# Altium PCB fpga.PcbDoc (part 1 of 6)
Units mm, origin at the board's own origin, x right, y up, seen from the top; angles counter-clockwise.
Board outline 111.63 x 111 mm, 2 copper layers (Top Layer, Bottom Layer); 5 components, 0 nets, 896 pads, 0 vias.
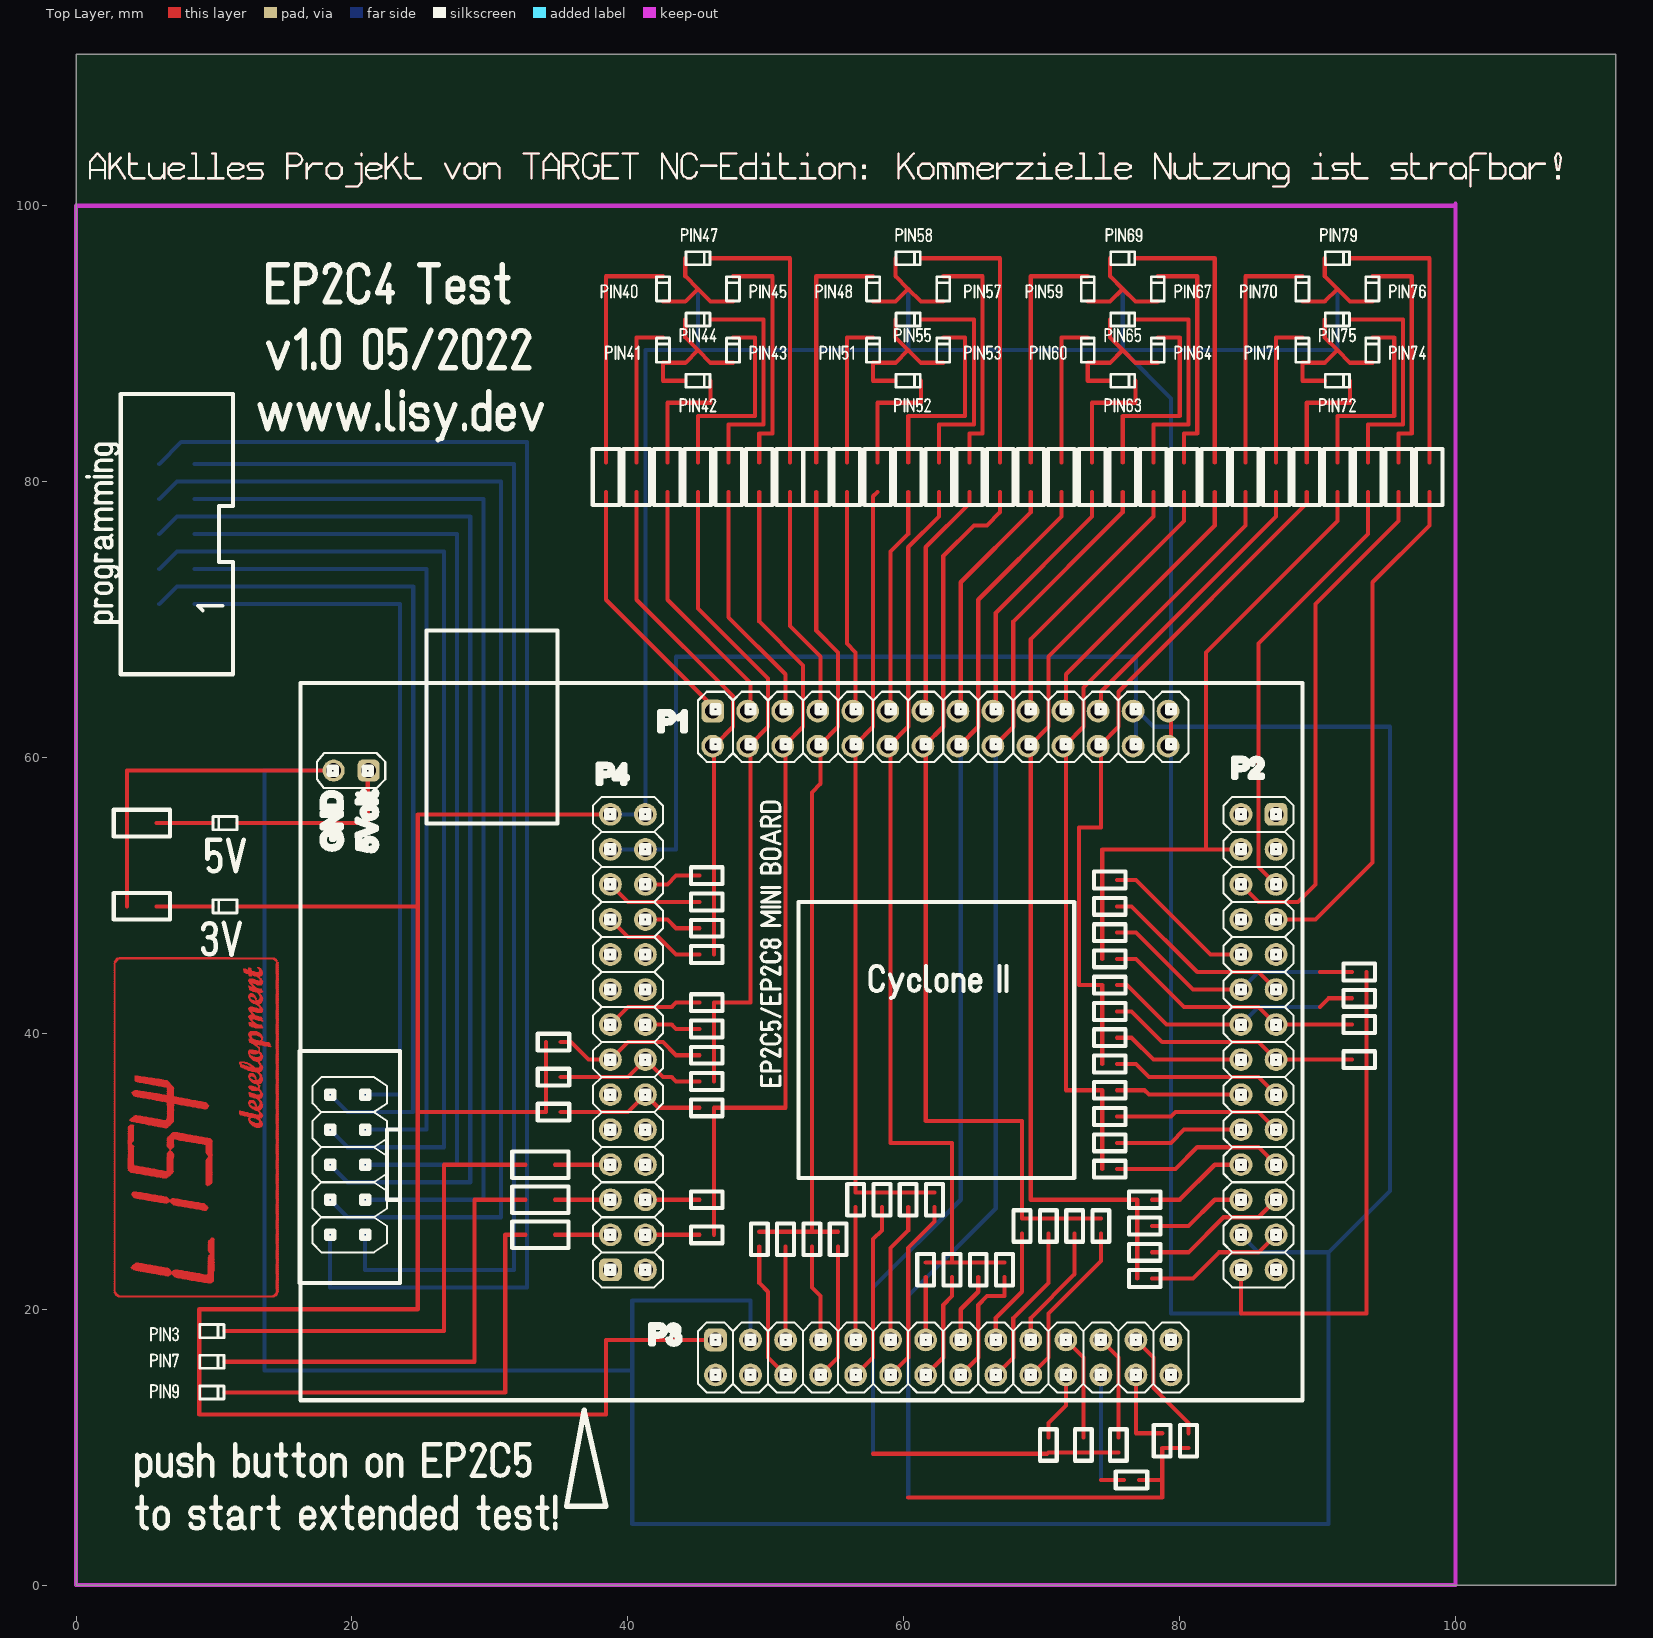
[diagram p0: Top Layer view]
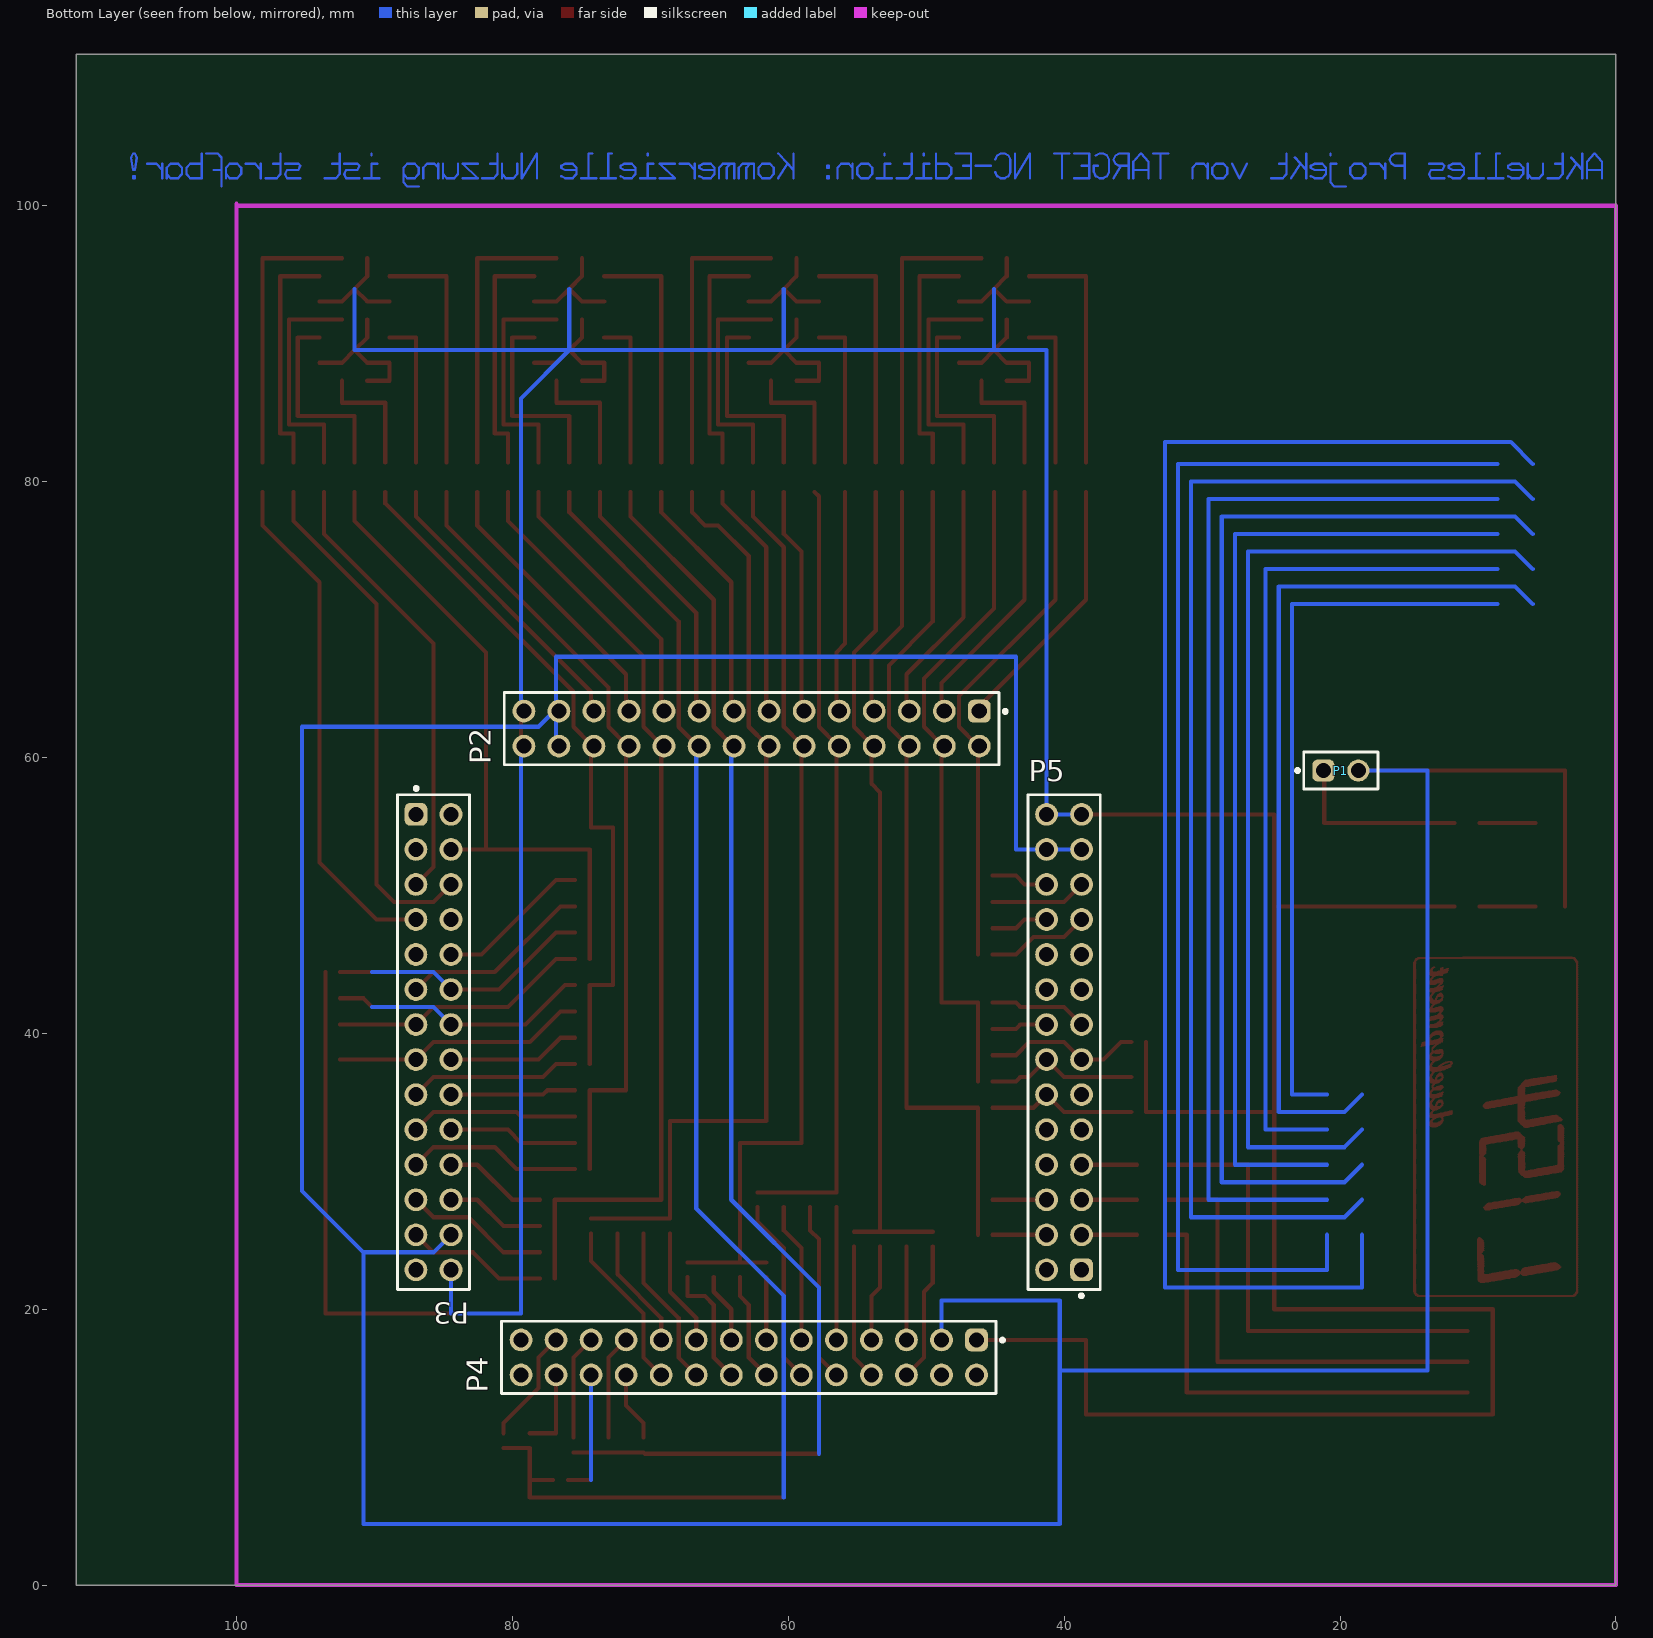
[diagram p1: Bottom Layer view, seen from below]

## Layer stack, top to bottom
Top Solder: solder mask 0.0102, Solder Resist, Dk 3.5
Top Layer: signal copper 0.0356
Dielectric 1: dielectric 0.32, FR-4, Dk 4.8
Bottom Layer: signal copper 0.0356
Bottom Solder: solder mask 0.0102, Solder Resist, Dk 3.5

## Board outline
0,0 111.633,0 111.633,110.998 0,110.998

## Design rules (kind name [scope] priority, off if disabled: settings)
Clearance [All] p1: gap=0.254 ignorepadtopadclearanceinfootprint=FALSE
PolygonConnect [All] p1: connectstyle=Relief reliefconductorwidth=0.254 reliefentries=4 polygonreliefangle="90 Angle" airgapwidth=0.254
RoutingVias [All] p1: holewidth=0.711 width=1.27 viastyle="Through Hole" minholewidth=0.711 minwidth=1.27 maxholewidth=0.711 maxwidth=1.27
SolderMaskExpansion [All] p1: expansion=0.102 istentingtop=FALSE
Width [All] p1: maxlimit=0.254 minlimit=0.254 preferedwidth=0.254
30 further rules are at their usual default settings.

## Components (designator, comment, footprint, x,y, rotation, side; value= is the part's Value field where it differs from the comment)
P1 "61300211121" 61300211121 19.939,59.055 r180 bottom
P2 "61302821121" 61302821121 62.66,62.095 r0 bottom
P3 "61302821121" 61302821121 85.725,39.37 r270 bottom (schematic designator P2)
P4 "61302821121" 61302821121 62.865,16.51 r0 bottom (schematic designator P2)
P5 "61302821121" 61302821121 40.005,39.37 r90 bottom (schematic designator P2)

## Footprints (in the part's own frame and the unit in brackets; to place one, negate y for a bottom-side part, rotate by r counter-clockwise, add the part's x,y. Pads: shape width x height; smd on the part's side, far side on the other; paste and mask are expansions set on the pad)
61300211121 [mm] "Pin Header, pitch 2.54 mm, THT, Vertical, single row, 2p"
  rrect50% 1.6x1.6 hole 1.1: 1(-1.27,0)
  round 1.6 hole 1.1: 2(1.27,0)
  silkscreen extent -3.26,-1.35 2.69,1.35, body extent -2.54,-1.27 2.54,1.27, height 8.57
61302821121 [mm] "Pin Header, pitch 2.54 mm, THT, Vertical, dual row, 28p"
  rrect50% 1.65x1.65 hole 1.1: 1(-16.51,-1.27)
  round 1.65 hole 1.1: 2(-16.51,1.27) 3(-13.97,-1.27) 4(-13.97,1.27) 5(-11.43,-1.27) 6(-11.43,1.27) 7(-8.89,-1.27) 8(-8.89,1.27) 9(-6.35,-1.27) 10(-6.35,1.27) 11(-3.81,-1.27) 12(-3.81,1.27) 13(-1.27,-1.27) 14(-1.27,1.27) 15(1.27,-1.27) 16(1.27,1.27) 17(3.81,-1.27) 18(3.81,1.27) 19(6.35,-1.27) 20(6.35,1.27) 21(8.89,-1.27) 22(8.89,1.27) 23(11.43,-1.27) 24(11.43,1.27) 25(13.97,-1.27) 26(13.97,1.27) 27(16.51,-1.27) 28(16.51,1.27)
  silkscreen extent -18.51,-2.62 17.93,2.62, body extent -17.78,-2.54 17.78,2.54, height 8.59

## Part data
P1: library part CMP-1712-00002-6, Color=Black, Contact Resistance=20mΩ, Current Rating=3A, Max Operating Temperature=125°C, Min Operating Temperature=-40°C, Operating Supply Voltage=250V, Connector Type="Male Pin", Contact Gender=Male, Contact Material=Copper, Contact Mating Length=5.9944mm, Contact Plating=Gold, Gender=Male, Height=8.94mm, Housing Material=PBT, Lead Free="Lead Free", Lead Pitch=2.54mm, Mount="Through Hole", NexarPartId=20081794, Number of Contacts=2, Number of Pins=2, Number of Positions=2, Number of Rows=1, Orientation=Vertical, Packaging=Bulk, Pitch=2.54mm, REACH SVHC="No SVHC", RoHS=Compliant, Termination="Through Hole", Voltage Rating=250V
P2 P3 P4 P5: library part CMP-1502-01115-3, Color=Black, Contact Resistance=20mΩ, Current Rating=3A, Operating Supply Voltage=250V, Connector Type="Male Pin", Contact Material=Copper, Contact Mating Length=5.9944mm, Contact Plating=Gold, Gender=Male, Lead Pitch=2.54mm, Mount="Through Hole", NexarPartId=32855566, Number of Contacts=28, Number of Pins=28, Number of Positions=28, Number of Rows=2, Orientation=Vertical, Packaging=Bulk, Pitch=2.54mm, REACH SVHC=Unknown, RoHS=Compliant, Row Spacing=2.54mm, Termination=Solder

## Free pads (board coordinates)
  rect 0x0 on Top Paste: 1(3.696,49.212) 1(3.696,55.245) 1(5.829,49.212) 1(5.829,55.245) 1(8.925,13.97) 1(8.925,16.192) 1(8.925,18.415) 1(9.877,49.212) 1(9.877,55.245) 1(10.76,13.97) 1(10.76,16.192) 1(10.76,18.415) 1(11.712,49.212) 1(11.712,55.245) 1(32.588,25.4) 1(32.588,27.94) 1(32.588,30.48) 1(34.074,34.29) 1(34.074,36.83) 1(34.074,39.37) 1(34.722,25.4) 1(34.722,27.94) 1(34.722,30.48) 1(35.141,34.29) 1(35.141,36.83) 1(35.141,39.37) 1(38.417,79.261) 1(38.417,81.394) 1(40.64,79.261) 1(40.64,81.394) 1(42.545,88.617) 1(42.545,90.452) 1(42.545,93.062) 1(42.545,94.897) 1(42.862,79.261) 1(42.862,81.394) 1(44.167,87.312) 1(44.167,91.757) 1(44.167,96.203) 1(45.085,79.261) 1(45.085,81.394) 1(45.187,25.4) 1(45.187,27.94) 1(45.187,34.608) 1(45.187,36.512) 1(45.187,38.417) 1(45.187,40.322) 1(45.187,42.227) 1(45.187,45.72) 1(45.187,47.625) 1(45.187,49.53) 1(45.187,51.435) 1(46.002,87.312) 1(46.002,91.757) 1(46.002,96.203) 1(46.253,25.4) 1(46.253,27.94) 1(46.253,34.608) 1(46.253,36.512) 1(46.253,38.417) 1(46.253,40.322) 1(46.253,42.227) 1(46.253,45.72) 1(46.253,47.625) 1(46.253,49.53) 1(46.253,51.435) 1(47.307,79.261) 1(47.307,81.394) 1(47.625,88.617) 1(47.625,90.452) 1(47.625,93.062) 1(47.625,94.897) 1(49.53,24.549) 1(49.53,25.616) 1(49.53,79.261) 1(49.53,81.394) 1(51.435,24.549) 1(51.435,25.616) 1(51.752,79.261) 1(51.752,81.394) 1(53.34,24.549) 1(53.34,25.616) 1(53.657,79.261) 1(53.657,81.394) 1(55.245,24.549) 1(55.245,25.616) 1(55.88,79.261) 1(55.88,81.394) 1(56.515,27.407) 1(56.515,28.473) 1(57.785,88.617) 1(57.785,90.452) 1(57.785,93.062) 1(57.785,94.897) 1(58.102,79.261) 1(58.102,81.394) 1(58.42,27.407) 1(58.42,28.473) 1(59.407,87.312) 1(59.407,91.757) 1(59.407,96.203) 1(60.325,27.407) 1(60.325,28.473) 1(60.325,79.261) 1(60.325,81.394) 1(61.242,87.312) 1(61.242,91.757) 1(61.242,96.203) 1(61.595,22.327) 1(61.595,23.393) 1(62.23,27.407) 1(62.23,28.473) 1(62.547,79.261) 1(62.547,81.394) 1(62.865,88.617) 1(62.865,90.452) 1(62.865,93.062) 1(62.865,94.897) 1(63.5,22.327) 1(63.5,23.393) 1(64.77,79.261) 1(64.77,81.394) 1(65.405,22.327) 1(65.405,23.393) 1(66.992,79.261) 1(66.992,81.394) 1(67.31,22.327) 1(67.31,23.393) 1(68.58,25.502) 1(68.58,26.568) 1(69.215,79.261) 1(69.215,81.394) 1(70.485,9.627) 1(70.485,10.693) 1(70.485,25.502) 1(70.485,26.568) 1(71.438,79.261) 1(71.438,81.394) 1(72.39,25.502) 1(72.39,26.568) 1(73.025,9.627) 1(73.025,10.693) 1(73.343,88.617) 1(73.343,90.452) 1(73.343,93.062) 1(73.343,94.897) 1(73.66,79.261) 1(73.66,81.394) 1(74.295,25.502) 1(74.295,26.568) 1(74.397,30.162) 1(74.397,32.067) 1(74.397,33.972) 1(74.397,35.877) 1(74.397,37.782) 1(74.397,39.688) 1(74.397,41.593) 1(74.397,43.497) 1(74.397,45.402) 1(74.397,47.307) 1(74.397,49.212) 1(74.397,51.117) 1(74.965,87.312) 1(74.965,91.757) 1(74.965,96.203) 1(75.463,30.162) 1(75.463,32.067) 1(75.463,33.972) 1(75.463,35.877) 1(75.463,37.782) 1(75.463,39.688) 1(75.463,41.593) 1(75.463,43.497) 1(75.463,45.402) 1(75.463,47.307) 1(75.463,49.212) 1(75.463,51.117) 1(75.565,9.627) 1(75.565,10.693) 1(75.882,79.261) 1(75.882,81.394) 1(75.984,7.62) 1(76.8,87.312) 1(76.8,91.757) 1(76.8,96.203) 1(76.937,22.225) 1(76.937,24.13) 1(76.937,26.035) 1(76.937,27.94) 1(77.051,7.62) 1(78.003,22.225) 1(78.003,24.13) 1(78.003,26.035) 1(78.003,27.94) 1(78.105,79.261) 1(78.105,81.394) 1(78.422,88.617) 1(78.422,90.452) 1(78.422,93.062) 1(78.422,94.897) 1(78.74,9.944) 1(78.74,11.011) 1(80.328,79.261) 1(80.328,81.394) 1(80.645,9.944) 1(80.645,11.011) 1(82.55,79.261) 1(82.55,81.394) 1(84.772,79.261) 1(84.772,81.394) 1(86.995,79.261) 1(86.995,81.394) 1(88.9,88.617) 1(88.9,90.452) 1(88.9,93.062) 1(88.9,94.897) 1(89.218,79.261) 1(89.218,81.394) 1(90.522,87.312) 1(90.522,91.757) 1(90.522,96.203) 1(91.44,79.261) 1(91.44,81.394) 1(92.357,87.312) 1(92.357,91.757) 1(92.357,96.203) 1(92.494,38.1) 1(92.494,40.64) 1(92.494,42.545) 1(92.494,44.45) 1(93.561,38.1) 1(93.561,40.64) 1(93.561,42.545) 1(93.561,44.45) 1(93.662,79.261) 1(93.662,81.394) 1(93.98,88.617) 1(93.98,90.452) 1(93.98,93.062) 1(93.98,94.897) 1(95.885,79.261) 1(95.885,81.394) 1(98.108,79.261) 1(98.108,81.394)
  rect 0x0 on Top Solder: 1(3.696,49.212) 1(3.696,55.245) 1(5.829,49.212) 1(5.829,55.245) 1(8.925,13.97) 1(8.925,16.192) 1(8.925,18.415) 1(9.877,49.212) 1(9.877,55.245) 1(10.76,13.97) 1(10.76,16.192) 1(10.76,18.415) 1(11.712,49.212) 1(11.712,55.245) 1(32.588,25.4) 1(32.588,27.94) 1(32.588,30.48) 1(34.074,34.29) 1(34.074,36.83) 1(34.074,39.37) 1(34.722,25.4) 1(34.722,27.94) 1(34.722,30.48) 1(35.141,34.29) 1(35.141,36.83) 1(35.141,39.37) 1(38.417,79.261) 1(38.417,81.394) 1(40.64,79.261) 1(40.64,81.394) 1(42.545,88.617) 1(42.545,90.452) 1(42.545,93.062) 1(42.545,94.897) 1(42.862,79.261) 1(42.862,81.394) 1(44.167,87.312) 1(44.167,91.757) 1(44.167,96.203) 1(45.085,79.261) 1(45.085,81.394) 1(45.187,25.4) 1(45.187,27.94) 1(45.187,34.608) 1(45.187,36.512) 1(45.187,38.417) 1(45.187,40.322) 1(45.187,42.227) 1(45.187,45.72) 1(45.187,47.625) 1(45.187,49.53) 1(45.187,51.435) 1(46.002,87.312) 1(46.002,91.757) 1(46.002,96.203) 1(46.253,25.4) 1(46.253,27.94) 1(46.253,34.608) 1(46.253,36.512) 1(46.253,38.417) 1(46.253,40.322) 1(46.253,42.227) 1(46.253,45.72) 1(46.253,47.625) 1(46.253,49.53) 1(46.253,51.435) 1(47.307,79.261) 1(47.307,81.394) 1(47.625,88.617) 1(47.625,90.452) 1(47.625,93.062) 1(47.625,94.897) 1(49.53,24.549) 1(49.53,25.616) 1(49.53,79.261) 1(49.53,81.394) 1(51.435,24.549) 1(51.435,25.616) 1(51.752,79.261) 1(51.752,81.394) 1(53.34,24.549) 1(53.34,25.616) 1(53.657,79.261) 1(53.657,81.394) 1(55.245,24.549) 1(55.245,25.616) 1(55.88,79.261) 1(55.88,81.394) 1(56.515,27.407) 1(56.515,28.473) 1(57.785,88.617) 1(57.785,90.452) 1(57.785,93.062) 1(57.785,94.897) 1(58.102,79.261) 1(58.102,81.394) 1(58.42,27.407) 1(58.42,28.473) 1(59.407,87.312) 1(59.407,91.757) 1(59.407,96.203) 1(60.325,27.407) 1(60.325,28.473) 1(60.325,79.261) 1(60.325,81.394) 1(61.242,87.312) 1(61.242,91.757) 1(61.242,96.203) 1(61.595,22.327) 1(61.595,23.393) 1(62.23,27.407) 1(62.23,28.473) 1(62.547,79.261) 1(62.547,81.394) 1(62.865,88.617) 1(62.865,90.452) 1(62.865,93.062) 1(62.865,94.897) 1(63.5,22.327) 1(63.5,23.393) 1(64.77,79.261) 1(64.77,81.394) 1(65.405,22.327) 1(65.405,23.393) 1(66.992,79.261) 1(66.992,81.394) 1(67.31,22.327) 1(67.31,23.393) 1(68.58,25.502) 1(68.58,26.568) 1(69.215,79.261) 1(69.215,81.394) 1(70.485,9.627) 1(70.485,10.693) 1(70.485,25.502) 1(70.485,26.568) 1(71.438,79.261) 1(71.438,81.394) 1(72.39,25.502) 1(72.39,26.568) 1(73.025,9.627) 1(73.025,10.693) 1(73.343,88.617) 1(73.343,90.452) 1(73.343,93.062) 1(73.343,94.897) 1(73.66,79.261) 1(73.66,81.394) 1(74.295,25.502) 1(74.295,26.568) 1(74.397,30.162) 1(74.397,32.067) 1(74.397,33.972) 1(74.397,35.877) 1(74.397,37.782) 1(74.397,39.688) 1(74.397,41.593) 1(74.397,43.497) 1(74.397,45.402) 1(74.397,47.307) 1(74.397,49.212) 1(74.397,51.117) 1(74.965,87.312) 1(74.965,91.757) 1(74.965,96.203) 1(75.463,30.162) 1(75.463,32.067) 1(75.463,33.972) 1(75.463,35.877) 1(75.463,37.782) 1(75.463,39.688) 1(75.463,41.593) 1(75.463,43.497) 1(75.463,45.402) 1(75.463,47.307) 1(75.463,49.212) 1(75.463,51.117) 1(75.565,9.627) 1(75.565,10.693) 1(75.882,79.261) 1(75.882,81.394) 1(75.984,7.62) 1(76.8,87.312) 1(76.8,91.757) 1(76.8,96.203) 1(76.937,22.225) 1(76.937,24.13) 1(76.937,26.035) 1(76.937,27.94) 1(77.051,7.62) 1(78.003,22.225) 1(78.003,24.13) 1(78.003,26.035) 1(78.003,27.94) 1(78.105,79.261) 1(78.105,81.394) 1(78.422,88.617) 1(78.422,90.452) 1(78.422,93.062) 1(78.422,94.897) 1(78.74,9.944) 1(78.74,11.011) 1(80.328,79.261) 1(80.328,81.394) 1(80.645,9.944) 1(80.645,11.011) 1(82.55,79.261) 1(82.55,81.394) 1(84.772,79.261) 1(84.772,81.394) 1(86.995,79.261) 1(86.995,81.394) 1(88.9,88.617) 1(88.9,90.452) 1(88.9,93.062) 1(88.9,94.897) 1(89.218,79.261) 1(89.218,81.394) 1(90.522,87.312) 1(90.522,91.757) 1(90.522,96.203) 1(91.44,79.261) 1(91.44,81.394) 1(92.357,87.312) 1(92.357,91.757) 1(92.357,96.203) 1(92.494,38.1) 1(92.494,40.64) 1(92.494,42.545) 1(92.494,44.45) 1(93.561,38.1) 1(93.561,40.64) 1(93.561,42.545) 1(93.561,44.45) 1(93.662,79.261) 1(93.662,81.394) 1(93.98,88.617) 1(93.98,90.452) 1(93.98,93.062) 1(93.98,94.897) 1(95.885,79.261) 1(95.885,81.394) 1(98.108,79.261) 1(98.108,81.394)
  round 0 on Bottom Solder: 1(6.032,71.12) 1(6.032,73.66) 1(6.032,76.2) 1(6.032,78.74) 1(6.032,81.28) 1(8.572,71.12) 1(8.572,73.66) 1(8.572,76.2) 1(8.572,78.74) 1(8.572,81.28) 1(18.415,25.4) 1(18.415,27.94) 1(18.415,30.48) 1(18.415,33.02) 1(18.415,35.56) 1(18.605,59.055) 1(20.955,25.4) 1(20.955,27.94) 1(20.955,30.48) 1(20.955,33.02) 1(20.955,35.56) 1(21.145,59.055) 1(38.735,22.86) 1(38.735,25.4) 1(38.735,27.94) 1(38.735,30.48) 1(38.735,33.02) 1(38.735,35.56) 1(38.735,38.1) 1(38.735,40.64) 1(38.735,43.18) 1(38.735,45.72) 1(38.735,48.26) 1(38.735,50.8) 1(38.735,53.34) 1(38.735,55.88) 1(41.275,22.86) 1(41.275,25.4) 1(41.275,27.94) 1(41.275,30.48) 1(41.275,33.02) 1(41.275,35.56) 1(41.275,38.1) 1(41.275,40.64) 1(41.275,43.18) 1(41.275,45.72) 1(41.275,48.26) 1(41.275,50.8) 1(41.275,53.34) 1(41.275,55.88) 1(45.085,89.535) 1(45.085,93.98) 1(46.355,15.24) 1(46.355,17.78) 1(46.355,60.96) 1(46.355,63.5) 1(48.895,15.24) 1(48.895,17.78) 1(48.895,60.96) 1(48.895,63.5) 1(51.435,15.24) 1(51.435,17.78) 1(51.435,60.96) 1(51.435,63.5) 1(53.975,15.24) 1(53.975,17.78) 1(53.975,60.96) 1(53.975,63.5) 1(56.515,15.24) 1(56.515,17.78) 1(56.515,60.96) 1(56.515,63.5) 1(57.785,9.525) 1(59.055,15.24) 1(59.055,17.78) 1(59.055,60.96) 1(59.055,63.5) 1(60.325,6.35) 1(60.325,89.535) 1(60.325,93.98) 1(61.595,15.24) 1(61.595,17.78) 1(61.595,60.96) 1(61.595,63.5) 1(64.135,15.24) 1(64.135,17.78) 1(64.135,60.96) 1(64.135,63.5) 1(66.675,15.24) 1(66.675,17.78) 1(66.675,60.96) 1(66.675,63.5) 1(69.215,15.24) 1(69.215,17.78) 1(69.215,60.96) 1(69.215,63.5) 1(71.755,15.24) 1(71.755,17.78) 1(71.755,60.96) 1(71.755,63.5) 1(74.295,7.62) 1(74.295,15.24) 1(74.295,17.78) 1(74.295,60.96) 1(74.295,63.5) 1(75.882,89.535) 1(75.882,93.98) 1(76.835,15.24) 1(76.835,17.78) 1(76.835,60.96) 1(76.835,63.5) 1(79.375,15.24) 1(79.375,17.78) 1(79.375,60.96) 1(79.375,63.5) 1(84.455,22.86) 1(84.455,25.4) 1(84.455,27.94) 1(84.455,30.48) 1(84.455,33.02) 1(84.455,35.56) 1(84.455,38.1) 1(84.455,40.64) 1(84.455,43.18) 1(84.455,45.72) 1(84.455,48.26) 1(84.455,50.8) 1(84.455,53.34) 1(84.455,55.88) 1(86.995,22.86) 1(86.995,25.4) 1(86.995,27.94) 1(86.995,30.48) 1(86.995,33.02) 1(86.995,35.56) 1(86.995,38.1) 1(86.995,40.64) 1(86.995,43.18) 1(86.995,45.72) 1(86.995,48.26) 1(86.995,50.8) 1(86.995,53.34) 1(86.995,55.88) 1(90.17,41.91) 1(90.17,44.45) 1(91.44,89.535) 1(91.44,93.98)
  round 0 on Top Solder: 1(6.032,71.12) 1(6.032,73.66) 1(6.032,76.2) 1(6.032,78.74) 1(6.032,81.28) 1(8.572,71.12) 1(8.572,73.66) 1(8.572,76.2) 1(8.572,78.74) 1(8.572,81.28) 1(18.415,25.4) 1(18.415,27.94) 1(18.415,30.48) 1(18.415,33.02) 1(18.415,35.56) 1(18.605,59.055) 1(20.955,25.4) 1(20.955,27.94) 1(20.955,30.48) 1(20.955,33.02) 1(20.955,35.56) 1(21.145,59.055) 1(38.735,22.86) 1(38.735,25.4) 1(38.735,27.94) 1(38.735,30.48) 1(38.735,33.02) 1(38.735,35.56) 1(38.735,38.1) 1(38.735,40.64) 1(38.735,43.18) 1(38.735,45.72) 1(38.735,48.26) 1(38.735,50.8) 1(38.735,53.34) 1(38.735,55.88) 1(41.275,22.86) 1(41.275,25.4) 1(41.275,27.94) 1(41.275,30.48) 1(41.275,33.02) 1(41.275,35.56) 1(41.275,38.1) 1(41.275,40.64) 1(41.275,43.18) 1(41.275,45.72) 1(41.275,48.26) 1(41.275,50.8) 1(41.275,53.34) 1(41.275,55.88) 1(45.085,89.535) 1(45.085,93.98) 1(46.355,15.24) 1(46.355,17.78) 1(46.355,60.96) 1(46.355,63.5) 1(48.895,15.24) 1(48.895,17.78) 1(48.895,60.96) 1(48.895,63.5) 1(51.435,15.24) 1(51.435,17.78) 1(51.435,60.96) 1(51.435,63.5) 1(53.975,15.24) 1(53.975,17.78) 1(53.975,60.96) 1(53.975,63.5) 1(56.515,15.24) 1(56.515,17.78) 1(56.515,60.96) 1(56.515,63.5) 1(57.785,9.525) 1(59.055,15.24) 1(59.055,17.78) 1(59.055,60.96) 1(59.055,63.5) 1(60.325,6.35) 1(60.325,89.535) 1(60.325,93.98) 1(61.595,15.24) 1(61.595,17.78) 1(61.595,60.96) 1(61.595,63.5) 1(64.135,15.24) 1(64.135,17.78) 1(64.135,60.96) 1(64.135,63.5) 1(66.675,15.24) 1(66.675,17.78) 1(66.675,60.96) 1(66.675,63.5) 1(69.215,15.24) 1(69.215,17.78) 1(69.215,60.96) 1(69.215,63.5) 1(71.755,15.24) 1(71.755,17.78) 1(71.755,60.96) 1(71.755,63.5) 1(74.295,7.62) 1(74.295,15.24) 1(74.295,17.78) 1(74.295,60.96) 1(74.295,63.5) 1(75.882,89.535) 1(75.882,93.98) 1(76.835,15.24) 1(76.835,17.78) 1(76.835,60.96) 1(76.835,63.5) 1(79.375,15.24) 1(79.375,17.78) 1(79.375,60.96) 1(79.375,63.5) 1(84.455,22.86) 1(84.455,25.4) 1(84.455,27.94) 1(84.455,30.48) 1(84.455,33.02) 1(84.455,35.56) 1(84.455,38.1) 1(84.455,40.64) 1(84.455,43.18) 1(84.455,45.72) 1(84.455,48.26) 1(84.455,50.8) 1(84.455,53.34) 1(84.455,55.88) 1(86.995,22.86) 1(86.995,25.4) 1(86.995,27.94) 1(86.995,30.48) 1(86.995,33.02) 1(86.995,35.56) 1(86.995,38.1) 1(86.995,40.64) 1(86.995,43.18) 1(86.995,45.72) 1(86.995,48.26) 1(86.995,50.8) 1(86.995,53.34) 1(86.995,55.88) 1(90.17,41.91) 1(90.17,44.45) 1(91.44,89.535) 1(91.44,93.98)

## Nets (pads, with @x,y where several pads share a name; then routed paths per layer and width w, separated by ;. In a path a pad name is that pad's centre, name@x,y a point inside that pad or via, vN(x,y) a via of type N, cw(c..) or ccw(c..) an arc to the next point about the centre after c; other vN are vias at no path point)
pads on no net: P1.1 P1.2 P2.1 P2.2 P2.3 P2.4 P2.5 P2.6 P2.7 P2.8 P2.9 P2.10 P2.11 P2.12 P2.13 P2.14 P2.15 P2.16 P2.17 P2.18 P2.19 P2.20 P2.21 P2.22 P2.23 P2.24 P2.25 P2.26 P2.27 P2.28 P3.1 P3.2 P3.3 P3.4 P3.5 P3.6 P3.7 P3.8 P3.9 P3.10 P3.11 P3.12 P3.13 P3.14 P3.15 P3.16 P3.17 P3.18 P3.19 P3.20 P3.21 P3.22 P3.23 P3.24 P3.25 P3.26 P3.27 P3.28 P4.1 P4.2 P4.3 P4.4 P4.5 P4.6 P4.7 P4.8 P4.9 P4.10 P4.11 P4.12 P4.13 P4.14 P4.15 P4.16 P4.17 P4.18 P4.19 P4.20 P4.21 P4.22 P4.23 P4.24 P4.25 P4.26 P4.27 P4.28 P5.1 P5.2 P5.3 P5.4 P5.5 P5.6 P5.7 P5.8 P5.9 P5.10 P5.11 P5.12 P5.13 P5.14 P5.15 P5.16 P5.17 P5.18 P5.19 P5.20 P5.21 P5.22 P5.23 P5.24 P5.25 P5.26 P5.27 P5.28
copper on no net: | length 6443.6